# EAGLE board Keypad2 (EAGLE 5.11)
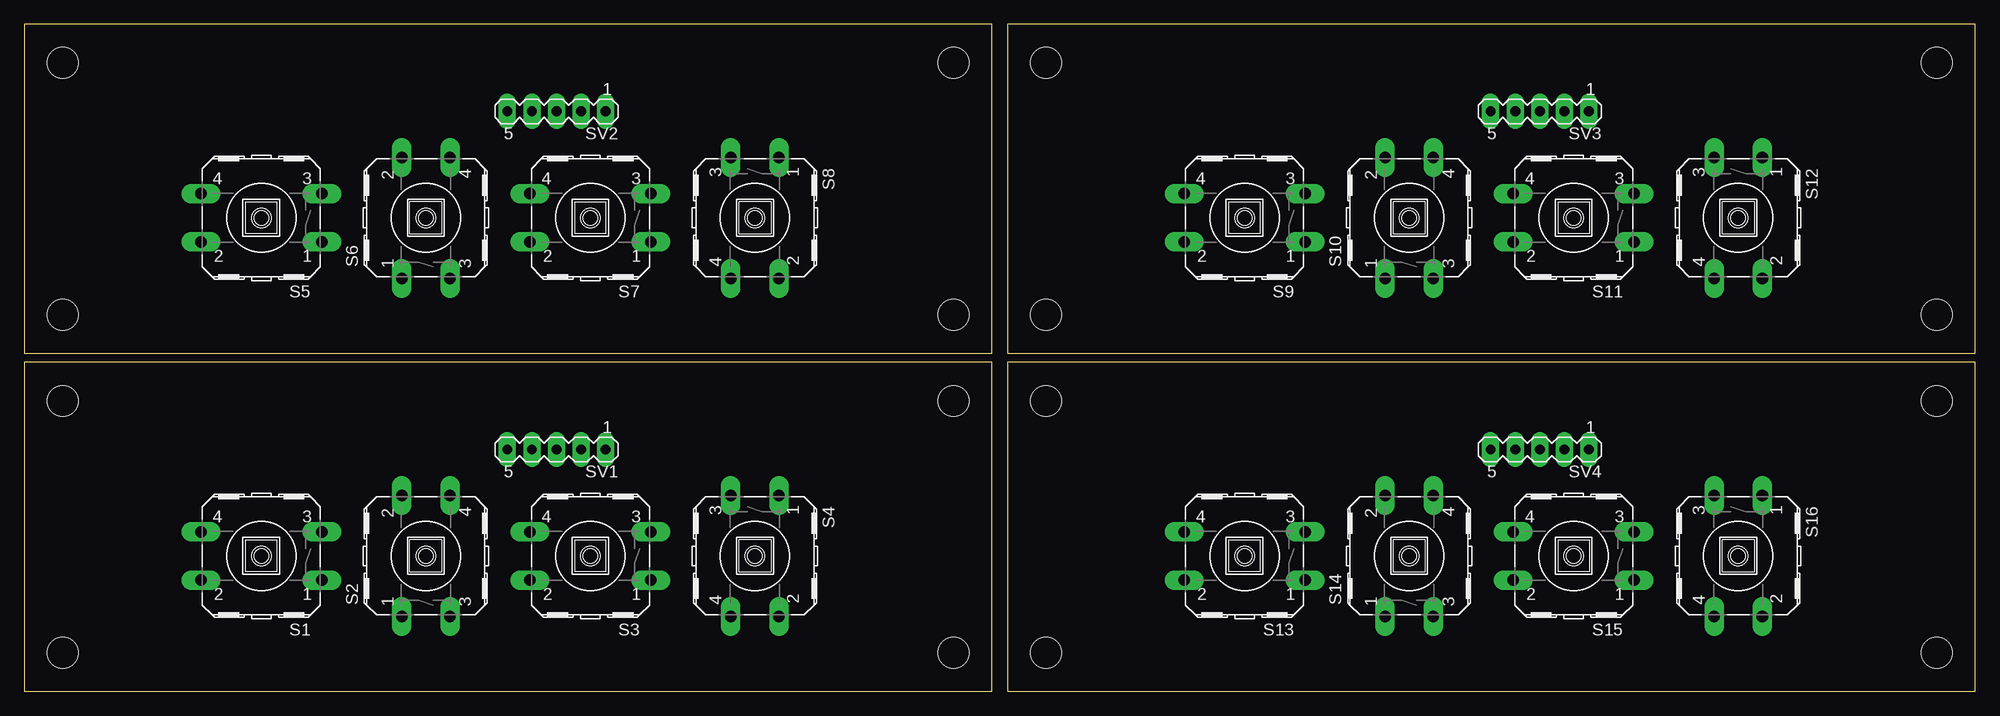
[diagram p0: board, top side]
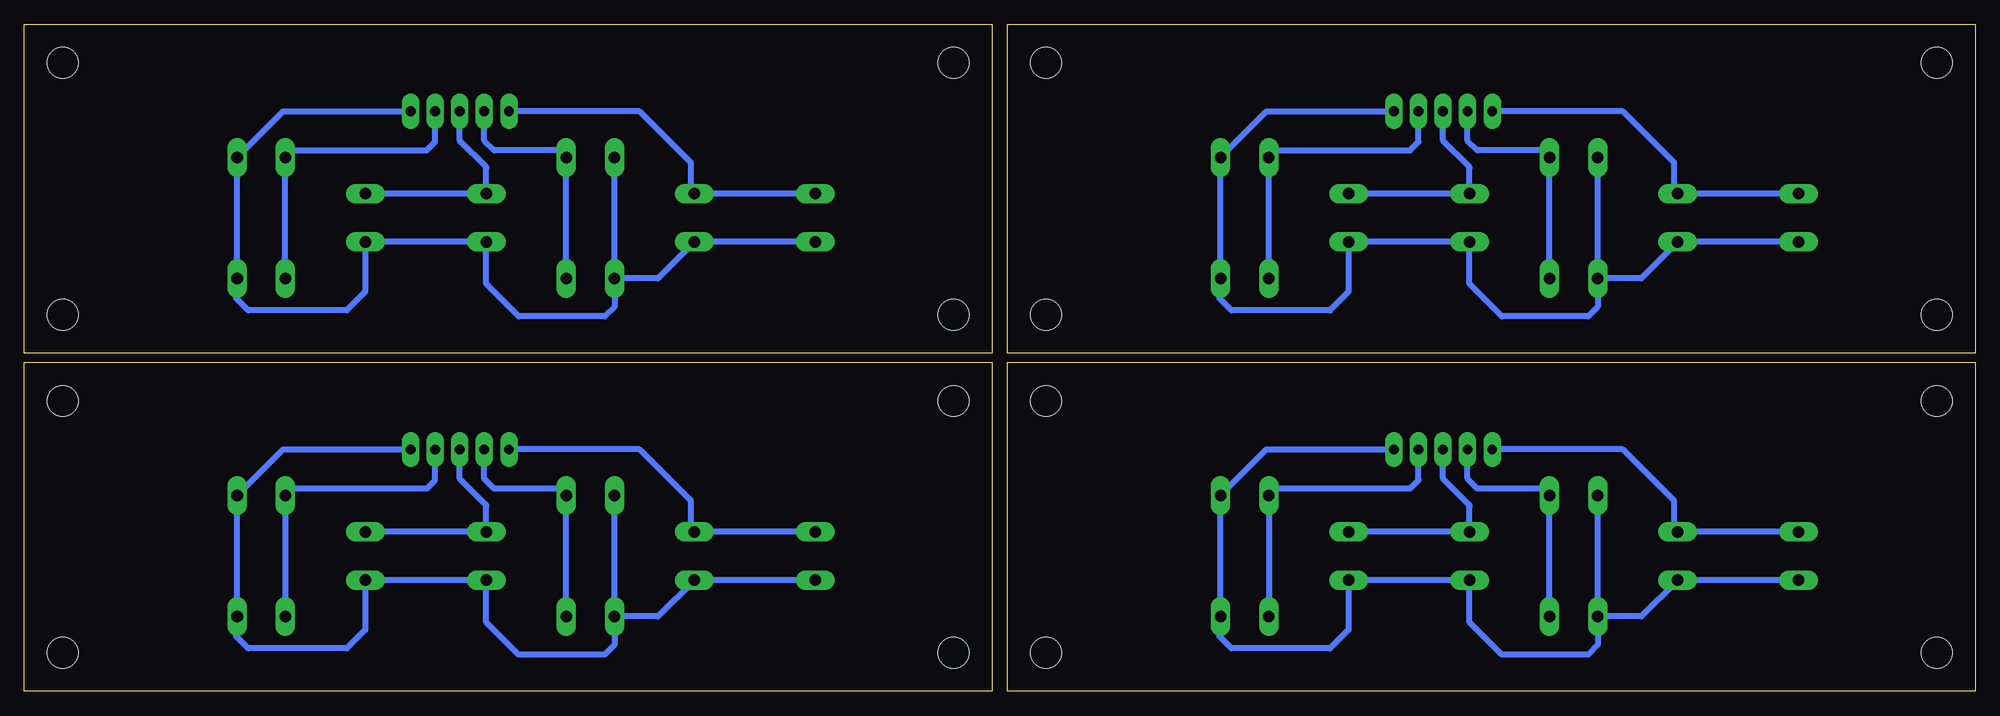
[diagram p1: board, bottom side, seen from below]

Size 201.6 x 68.92 mm. Coordinates in mm from the lower left corner, seen from the top.
Outline: 0,0 100,0 100,34 0,34 0,0
Outline: 0,34.92 100,34.92 100,68.92 0,68.92 0,34.92
Outline: 101.6,34.92 201.6,34.92 201.6,68.92 101.6,68.92 101.6,34.92
Outline: 101.6,0 201.6,0 201.6,34 101.6,34 101.6,0
Copper layers (1*16): Top 0.035mm / dielectric 1.5mm / Bottom 0.035mm
Design rules "test": minimum track width 16mil, minimum drill 20mil, track to track 16mil, track to pad 16mil, pad to pad 16mil, via to via 16mil, smd to smd 8mil, copper to edge 10mil, drill to drill 8mil, minimum pad ring 16mil, minimum via ring 20mil, stop-mask expansion 2mil, vias tented up to drill 25mil, thermal gap 10mil
Holes 3.2 mm at 4,30 4,4 96,30 96,4 4,64.92 4,38.92 96,64.92 96,38.92 105.6,64.92 105.6,38.92 197.6,64.92 197.6,38.92 105.6,30 105.6,4 197.6,30 197.6,4

## Footprints (pad centres in the part's own frame; a part is rotated, then mirrored left to right if it is on the bottom)
B3F-40XXNOHOLES = drill 1.194 long: 1 -6.248,2.489; 2 6.248,2.489; 3 -6.248,-2.489; 4 6.248,-2.489
MA05-1 = drill 1.016 long: 1 -5.08,0; 2 -2.54,0; 3 0,0; 4 2.54,0; 5 5.08,0

## Placement (x,y rotation side)
S1  [B3F-40XXNOHOLES]  24.5,14 180 top
S2  [B3F-40XXNOHOLES]  41.5,14 90 top
S3  [B3F-40XXNOHOLES]  58.5,14 180 top
S4  [B3F-40XXNOHOLES]  75.5,14 270 top
S5  [B3F-40XXNOHOLES]  24.5,48.92 180 top
S6  [B3F-40XXNOHOLES]  41.5,48.92 90 top
S7  [B3F-40XXNOHOLES]  58.5,48.92 180 top
S8  [B3F-40XXNOHOLES]  75.5,48.92 270 top
S9  [B3F-40XXNOHOLES]  126.1,48.92 180 top
S10  [B3F-40XXNOHOLES]  143.1,48.92 90 top
S11  [B3F-40XXNOHOLES]  160.1,48.92 180 top
S12  [B3F-40XXNOHOLES]  177.1,48.92 270 top
S13  [B3F-40XXNOHOLES]  126.1,14 180 top
S14  [B3F-40XXNOHOLES]  143.1,14 90 top
S15  [B3F-40XXNOHOLES]  160.1,14 180 top
S16  [B3F-40XXNOHOLES]  177.1,14 270 top
SV1  [MA05-1]  55,25 180 top
SV2  [MA05-1]  55,59.92 180 top
SV3  [MA05-1]  156.6,59.92 180 top
SV4  [MA05-1]  156.6,25 180 top

## Library data of the parts
S1-S16 = switch-omron
SV1-SV4 = con-lstb; OC_FARNELL: unknown; OC_NEWARK: unknown

## Nets
N$1: S7.3 S7.4 SV2.3
N$2: S6.3 S6.4 SV2.4
N$3: S5.1 S5.2 S6.1 S6.2 S7.1 S7.2 S8.1 S8.2 SV2.1
N$4: S8.3 S8.4 SV2.2
N$5: S5.3 S5.4 SV2.5
N$6: S4.3 S4.4 SV1.2
N$7: S3.3 S3.4 SV1.3
N$8: S2.3 S2.4 SV1.4
N$9: S1.3 S1.4 SV1.5
N$10: S11.3 S11.4 SV3.3
N$11: S10.3 S10.4 SV3.4
N$12: S9.1 S9.2 S10.1 S10.2 S11.1 S11.2 S12.1 S12.2 SV3.1
N$13: S12.3 S12.4 SV3.2
N$14: S9.3 S9.4 SV3.5
N$15: S15.3 S15.4 SV4.3
N$16: S14.3 S14.4 SV4.4
N$17: S13.1 S13.2 S14.1 S14.2 S15.1 S15.2 S16.1 S16.2 SV4.1
N$18: S16.3 S16.4 SV4.2
N$19: S13.3 S13.4 SV4.5
N$21: S1.1 S1.2 S2.1 S2.2 S3.1 S3.2 S4.1 S4.2 SV1.1

## Tracks (layer width: path | path; a pad name or v marks a point on that pad's centre or on a via)
N$1
  Bottom 0.61: S7.4 S7.3 | SV2.3 55,56.91 52.33,54.23 arc45 52.25,54.05 S7.4 | S7.4 52.07,51.49
N$2
  Bottom 0.61: S6.3 S6.4 44.7,55.88 51.44,55.88 52.46,56.91 SV2.4
N$3
  Bottom 0.61: S5.2 S5.1 34.51,42.68 S6.1 | S6.1 S6.2 | S6.1 39.01,39.73 40.01,38.73 48.9,38.73 52.25,42.09 S7.2 S7.1 64.75,41.3 66.67,39.37 76.83,39.37 78.11,40.64 78.11,42.56 S8.2 S8.1 73.24,59.92 SV2.1
N$4
  Bottom 0.61: S8.4 S8.3 72.3,55.88 58.42,55.88 57.54,56.76 SV2.2
N$5
  Bottom 0.61: S5.4 30.46,51.41 30.48,51.44 | 30.48,51.44 31.11,52.07 | 30.48,51.44 30.5,51.41 S5.3 31.11,51.78 31.11,54.61 36.43,59.92 SV2.5
N$6
  Bottom 0.61: S4.4 S4.3 72.3,20.95 58.42,20.95 57.54,21.84 SV1.2
N$7
  Bottom 0.61: S3.4 S3.3 | SV1.3 55,21.98 52.33,19.31 arc45 52.25,19.13 S3.4 | S3.4 52.07,16.56
N$8
  Bottom 0.61: S2.3 S2.4 44.7,20.95 51.44,20.95 52.46,21.98 SV1.4
N$9
  Bottom 0.61: S1.4 30.46,16.49 30.48,16.51 | 30.48,16.51 31.11,17.14 | 30.48,16.51 30.5,16.49 S1.3 31.11,16.86 31.11,19.68 36.43,25 SV1.5
N$10
  Bottom 0.61: S11.4 S11.3 | SV3.3 156.6,56.91 153.93,54.23 arc45 153.85,54.05 S11.4 | S11.4 153.67,51.49
N$11
  Bottom 0.61: S10.3 S10.4 146.3,55.88 153.03,55.88 154.06,56.91 SV3.4
N$12
  Bottom 0.61: S9.2 S9.1 136.11,42.68 S10.1 | S10.1 S10.2 | S10.1 140.61,39.73 141.6,38.73 150.5,38.73 153.85,42.09 S11.2 S11.1 166.35,41.3 168.28,39.37 178.44,39.37 179.71,40.64 179.71,42.56 S12.2 S12.1 174.84,59.92 SV3.1
N$13
  Bottom 0.61: S12.4 S12.3 173.9,55.88 160.02,55.88 159.14,56.76 SV3.2
N$14
  Bottom 0.61: S9.4 132.06,51.41 132.08,51.44 | 132.08,51.44 132.72,52.07 | 132.08,51.44 132.1,51.41 S9.3 132.72,51.78 132.72,54.61 138.03,59.92 SV3.5
N$15
  Bottom 0.61: S15.4 S15.3 | SV4.3 156.6,21.98 153.93,19.31 arc45 153.85,19.13 S15.4 | S15.4 153.67,16.56
N$16
  Bottom 0.61: S14.3 S14.4 146.3,20.95 153.03,20.95 154.06,21.98 SV4.4
N$17
  Bottom 0.61: S13.2 S13.1 136.11,7.75 S14.1 | S14.1 S14.2 | S14.1 140.61,4.8 141.6,3.81 150.5,3.81 153.85,7.17 S15.2 S15.1 166.35,6.37 168.28,4.45 178.44,4.45 179.71,5.71 179.71,7.64 S16.2 S16.1 174.84,25 SV4.1
N$18
  Bottom 0.61: S16.4 S16.3 173.9,20.95 160.02,20.95 159.14,21.84 SV4.2
N$19
  Bottom 0.61: S13.4 132.06,16.49 132.08,16.51 | 132.08,16.51 132.72,17.14 | 132.08,16.51 132.1,16.49 S13.3 132.72,16.86 132.72,19.68 138.03,25 SV4.5
N$21
  Bottom 0.61: S1.2 S1.1 34.51,7.75 S2.1 | S2.1 S2.2 | S2.1 39.01,4.8 40.01,3.81 48.9,3.81 52.25,7.17 S3.2 S3.1 64.75,6.37 66.67,4.45 76.83,4.45 78.11,5.71 78.11,7.64 S4.2 S4.1 73.24,25 SV1.1